# Altium PCB Arduino_Nano_V3.3.PcbDoc
Units mil, origin at the board's own origin, x right, y up, seen from the top; angles counter-clockwise.
Board outline 1702.76 x 708.66 mil, 2 copper layers (Top Layer, Bottom Layer), stack 65.792 mil thick; 27 components, 43 nets, 160 pads, 66 vias.
Unrouted connection lines stored in the file: 2.
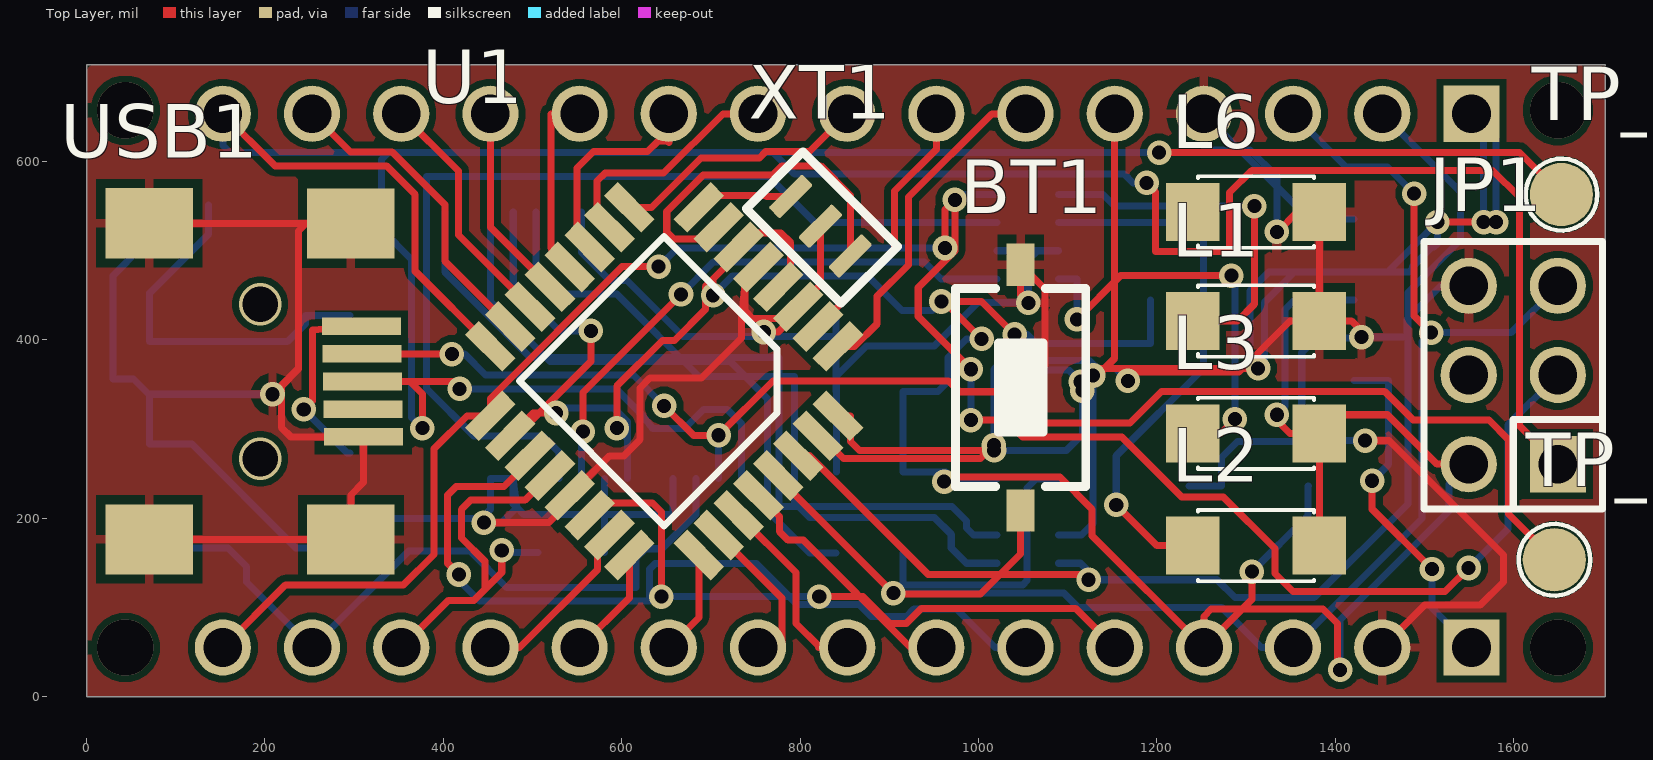
[diagram p0: Top Layer view]
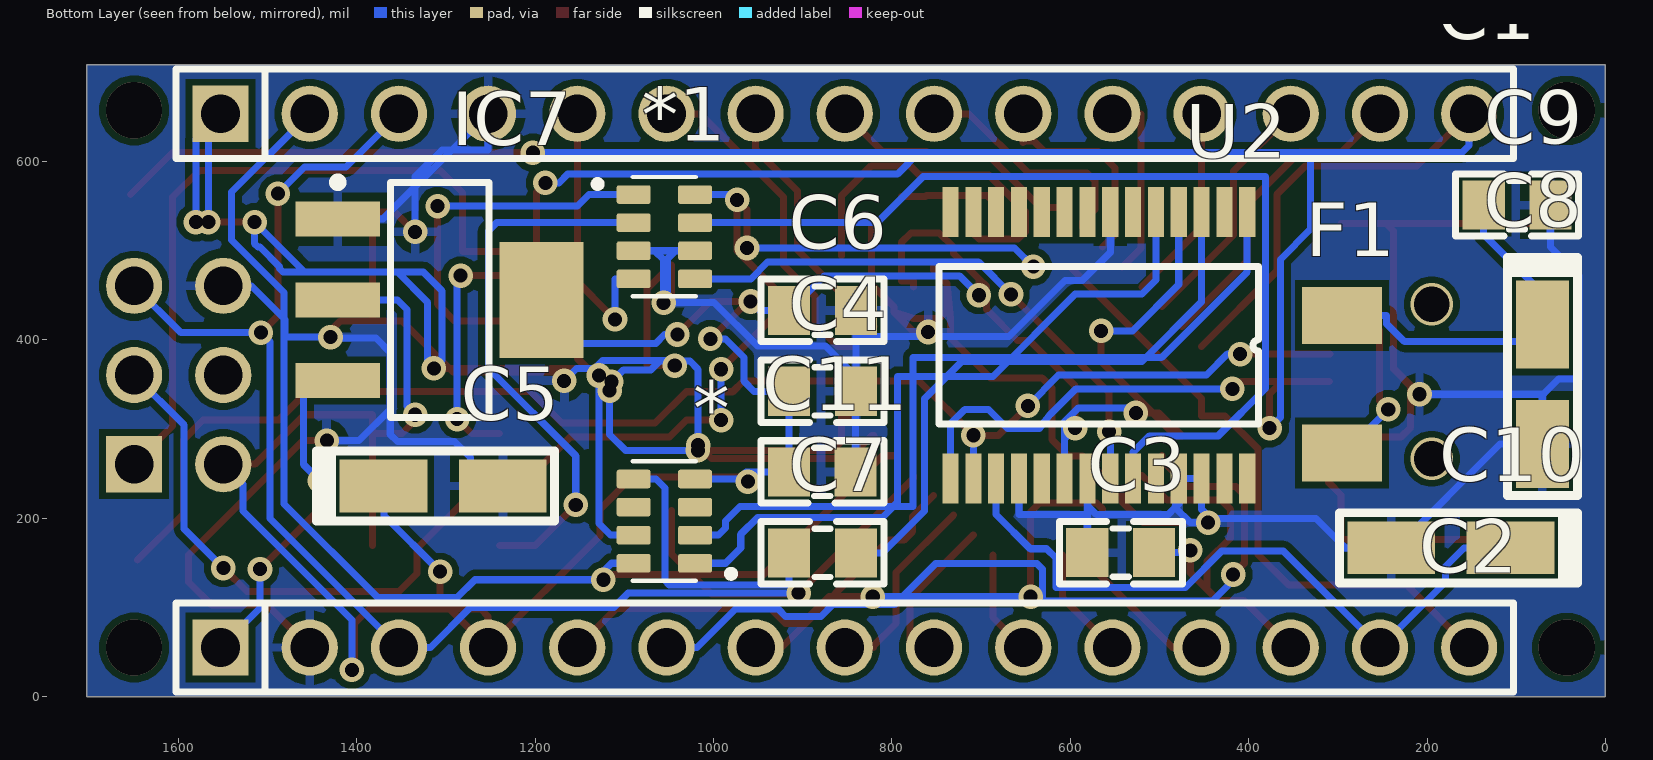
[diagram p1: Bottom Layer view, seen from below]
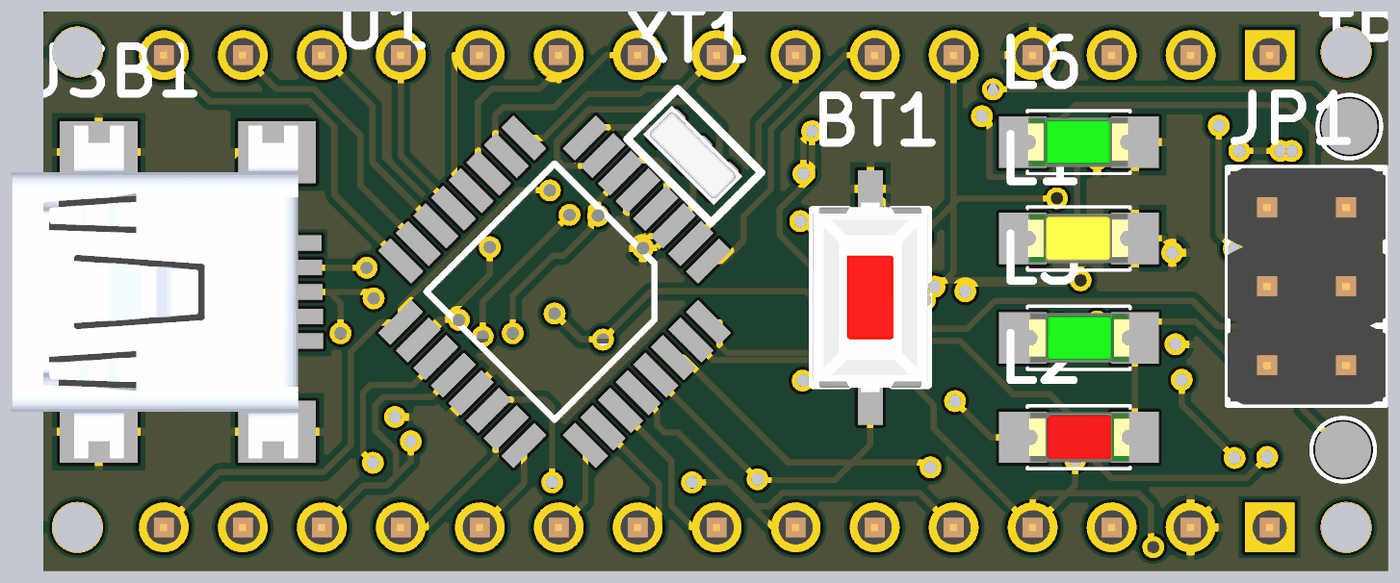
[diagram p2: 3D render of the assembled board from above, using the file's embedded part models]
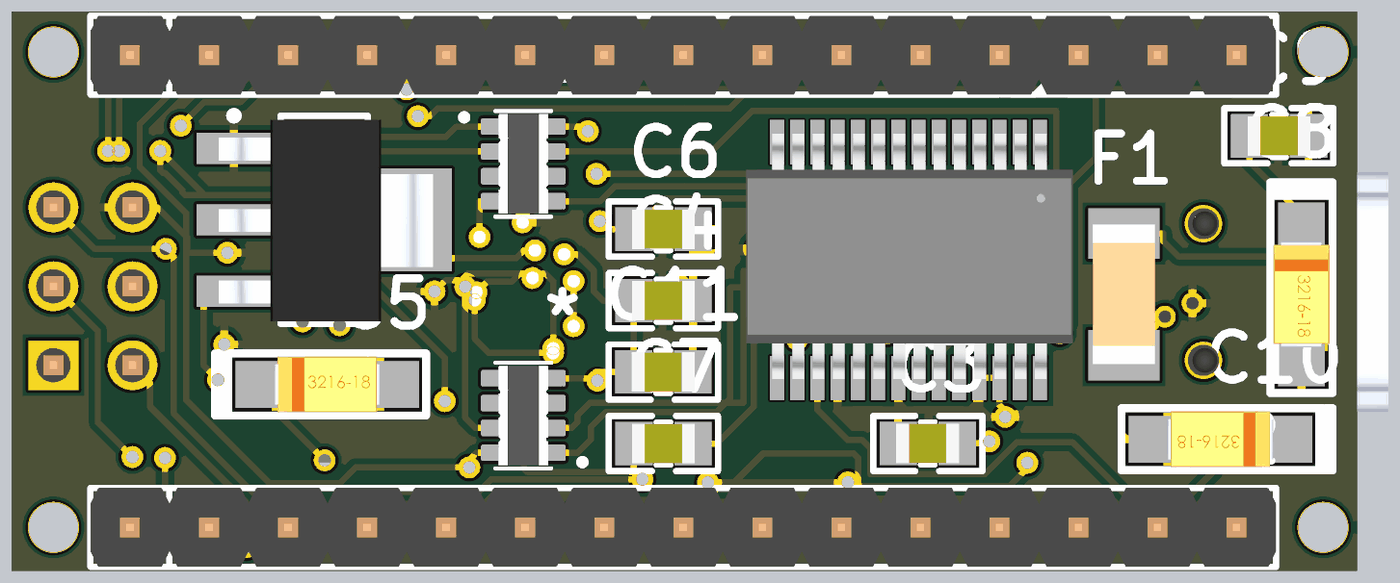
[diagram p3: 3D render of the assembled board from below, using the file's embedded part models]

## Layer stack, top to bottom
Top Solder: solder mask 0.4, Solder Resist, Dk 3.5
Top Layer: signal copper 1.4
Dielectric 1: dielectric 62.9921, FR-4, Dk 4.8
Bottom Layer: signal copper 1.4
Bottom Solder: solder mask 0.4, Solder Resist, Dk 3.5

## Board outline
0,0 1702.76,0 1702.76,708.66 0,708.66

## Design rules (kind name [scope] priority, off if disabled: settings)
Clearance [All] p1: gap=7.48 ignorepadtopadclearanceinfootprint=FALSE
PolygonConnect [All] p1: connectstyle=Relief reliefconductorwidth=10 reliefentries=4 polygonreliefangle="90 Angle" airgapwidth=10
RoutingVias RoutingVias_Power [InNetClass('Power_Class')] p1: holewidth=28 width=50 viastyle="Through Hole" minholewidth=28 minwidth=50 maxholewidth=28 maxwidth=50
RoutingVias RoutingVias_Signal [All] p2: holewidth=15.75 width=27.56 viastyle="Through Hole" minholewidth=15.75 minwidth=27.56 maxholewidth=15.75 maxwidth=27.56
SolderMaskExpansion [All] p1: expansion=4 istentingtop=FALSE
Width Width_Power [InNetClass('Power_Class')] p1: maxlimit=78.74 minlimit=11.81 preferedwidth=39.37
Width Width_Signal [All] p2: maxlimit=7.87 minlimit=7.87 preferedwidth=7.87
30 further rules are at their usual default settings.

## Components (designator, comment, footprint, x,y, rotation, side; value= is the part's Value field where it differs from the comment)
* "CAY16" CAY16 1055.12,196.85 r0 bottom
*1 "CAY16" CAY16 1055.12,515.75 r180 bottom
BT1 "Nut Nhan 2 Chan SMD 3x6x2.5" "Nut Nhan 2 Chan SMD 3x6x2.5" 1047.24,346.46 r90 top
C1 "JP15" JP15-D1T 1552.76,653.54 r180 bottom
C2 "JP15" JP15-D1T 1552.76,55.12 r180 bottom
C3 "10pF" "tu 0805" 543.31,161.42 r0 bottom
C4 "10pF" "tu 0805" 877.95,342.52 r180 bottom
C5 "10uF" "tu tantalum smd3216" 1303.15,236.22 r180 bottom
C6 "10pF" "tu 0805" 877.95,433.07 r180 bottom
C7 "105" "tu 0805" 877.95,161.42 r180 bottom
C8 "10uF" "tu tantalum smd3216" 70.6,350.39 r270 bottom
C9 "105" "tu 0805" 99.17,551.32 r180 bottom
C10 "10uF" "tu tantalum smd3216" 173.23,166.85 r0 bottom
C11 "105" "tu 0805" 877.95,251.97 r0 bottom
F1 "0.5A 125V" "Cau Chi SMD1808" 295.28,350.39 r90 bottom
IC7 "LM1117" SOT223-4N 1307.09,444.88 r180 bottom value=LM317
JP1 "JP 2x3 2.54" "JP 2x3 DT" 1599.61,360.63 r90 top
L1 "LED 0805" LED-1206-Yellow 1240.16,421.26 r0 top
L2 "LED 0805" LED-1206-Red 1382.16,169.29 r180 top
L3 "LED 0805" LED-1206-Green 1382.16,295.28 r180 top
L6 "LED 0805" LED-1206-Green 1240.16,543.31 r0 top
TP_D+ "TP_D+" TP 1700.59,516.73 r90 top
TP_D- "TP_D-" TP 1692.72,107.28 r90 top
U1 "ATMEGA328P_TQFP32" TQFP32 842.4,392.79 r225 top
U2 "FT232RL" SSOP28 401.57,543.31 r270 bottom
USB1 "USB Mini 5p SMD" "USB Mini 5p SMD" 173.23,350.39 r90 top
XT1 "20Mhz" "Thach Anh 3 Chan SMD" 856.24,494.15 r135 top value=4Mhz

## Footprints (in the part's own frame and the unit in brackets; to place one, negate y for a bottom-side part, rotate by r counter-clockwise, add the part's x,y. Pads: shape width x height; smd on the part's side, far side on the other; paste and mask are expansions set on the pad)
"Cau Chi SMD1808" [mil]
  rect 64x90 smd: 1(-77,0) 2(77,0)
  body extent -91,-39 91,39, height 39
CAY16 [mm]
  rrect25% 0.97x0.53 smd: 1(-0.875,1.2) 2(-0.875,0.4) 3(-0.875,-0.4) 4(-0.875,-1.2) 5(0.875,-1.2) 6(0.875,-0.4) 7(0.875,0.4) 8(0.875,1.2)
  silkscreen extent -2,-1.7 0.9,1.7, body extent -0.8,-1.6 0.8,1.6, height 0.6
JP15-D1T [mm] "15  pins, 1 row, straight, gold plating"
  rect 1.6x1.6 hole 1.1: 1(0,0)
  round 1.6 hole 1.1: 2(2.54,0) 3(5.08,0) 4(7.62,0) 5(10.16,0) 6(12.7,0) 7(15.24,0) 8(17.78,0) 9(20.32,0) 10(22.86,0) 11(25.4,0) 12(27.94,0) 13(30.48,0) 14(33.02,0) 15(35.56,0)
  silkscreen extent -1.27,-1.27 36.83,1.27, body extent -1.27,-1.27 36.83,1.27, height 8.54
"JP 2x3 DT" [mm]
  rect 1.6x1.6 hole 1.1: 1(-2.54,-1.27)
  round 1.6 hole 1.1: 2(0,-1.27) 3(2.54,-1.27) 4(2.54,1.27) 5(0,1.27) 6(-2.54,1.27)
  silkscreen extent -3.81,-2.54 3.81,2.54, body extent -3.81,-2.54 3.81,2.54, height 8.55
LED-1206-Green [mil]
  rect 60x65 smd: 1(0,0) 2(142,0)
  silkscreen extent 6,-40 136,40, body extent 7,-31 133,32, height 43
LED-1206-Red [mil]
  rect 60x65 smd: 1(0,0) 2(142,0)
  silkscreen extent 6,-40 136,40, body extent 7,-31 133,32, height 43
LED-1206-Yellow [mil]
  rect 60x65 smd: 1(0,0) 2(142,0)
  silkscreen extent 6,-40 136,40, body extent 7,-31 133,32, height 43
"Nut Nhan 2 Chan SMD 3x6x2.5" [mm] "Switch SMD type"
  rect 1.2x0.8 smd: 1(-3.5,0) 2(3.5,0)
  silkscreen extent -2.82,-1.85 2.82,1.85, body extent -3.05,-1.85 3.05,1.85, height 2.5
SOT223-4N [mm] "SOT223, 4-Leads, Body 6.5x3.5mm, Pitch 2.3mm, Lead Span 7mm, IPC Medium Density"
  rect 2.4x1 smd: 1(-2.9,2.3) 2(-2.9,0) 3(-2.9,-2.3)
  rect 2.4x3.3 smd: 4(2.9,0)
  silkscreen extent -3.03,-3.35 1.4,3.47, body extent -3.39,-3.27 3.5,3.23, height 1.72
SSOP28 [mm]
  rect 1.43x0.46 smd mask+0.06: 1(0,0) 2(0,-0.65) 3(0,-1.3) 4(0,-1.95) 5(0,-2.6) 6(0,-3.25) 7(0,-3.9) 8(0,-4.55) 9(0,-5.2) 10(0,-5.85) 11(0,-6.5) 12(0,-7.15) 13(0,-7.8) 14(0,-8.45) 15(7.59,-8.45) 16(7.59,-7.8) 17(7.59,-7.15) 18(7.59,-6.5) 19(7.59,-5.85) 20(7.59,-5.2) 21(7.59,-4.55) 22(7.59,-3.9) 23(7.59,-3.25) 24(7.59,-2.6) 25(7.59,-1.95) 26(7.59,-1.3) 27(7.59,-0.65) 28(7.59,0)
  silkscreen extent 1.55,-8.77 6.04,0.33, body extent -0.27,-9.44 7.63,1.05, height 2.01
"Thach Anh 3 Chan SMD" [mm] "SMD Crystal CMR309T package"
  rrect25% 0.45x1.35 smd: 1(0,0) 2(1.2,0) 3(2.4,0)
  silkscreen extent -0.76,-1.14 3.05,1.14, body extent -0.41,-0.63 2.79,0.67, height 1.02
TP [mm]
  round 1.8 smd: 1(1.175,1.195)
  silkscreen extent 0.15,0.17 2.2,2.21
TQFP32 [mm]
  rect 1.5x0.55 smd paste+0 mask+0.1: 1(0,0) 2(0,-0.8) 3(0,-1.6) 4(0,-2.4) 5(0,-3.2) 6(0,-4) 7(0,-4.8) 8(0,-5.6) 17(8.4,-5.6) 18(8.4,-4.8) 19(8.4,-4) 20(8.4,-3.2) 21(8.4,-2.4) 22(8.4,-1.6) 23(8.4,-0.8) 24(8.4,0)
  rect 0.55x1.5 smd paste+0 mask+0.1: 9(1.4,-7) 10(2.2,-7) 11(3,-7) 12(3.8,-7) 13(4.6,-7) 14(5.4,-7) 15(6.2,-7) 16(7,-7) 25(7,1.4) 26(6.2,1.4) 27(5.4,1.4) 28(4.6,1.4) 29(3.8,1.4) 30(3,1.4) 31(2.2,1.4) 32(1.4,1.4)
  silkscreen extent 1.28,-5.72 7.11,0.12, body extent -0.32,-7.3 8.7,1.71, height 1.1
"tu 0805" [mm] "Compoment SMD 80x50mil"
  rect 1.2x1.4 smd: 1(-0.946,-0.003) 2(0.954,-0.003)
  silkscreen extent -1.75,-0.89 1.75,0.89, body extent -1.01,-0.64 1.01,0.63, height 0.61
"tu tantalum smd3216" [mm]
  rect 2.5x1.5 smd: 1(-1.7,0) 2(1.7,0)
  silkscreen extent -3.61,-1 3.18,1, body extent -1.7,-0.9 1.7,0.9, height 1.69
"USB Mini 5p SMD" [mm]
  rect 0.5x2.25 smd: 1(1.651,-3.429) 2(0.864,-3.442) 3(0.076,-3.454) 4(-0.711,-3.467) 5(-1.499,-3.48)
  rect 2x2.5 smd: 5(-4.424,-3.124) 5(-4.42,2.616) 5(4.576,-3.124) 5(4.58,2.616)
  body extent -5.27,-3.8 5.43,5.4, height 3.95

## Part data
C1 C2: "WR-PHD 2.54 mm Angled Socket Header", Manufacturer="W¨¹rth Elektronik eiSos GmbH", partNo=613015143121, ComponentLink1 Description=Manufacturer, ComponentLink1URL=http://www.we-online.com, ComponentLink2 Description=Datasheet, ComponentLink2URL=http://katalog.we-online.de/em/datasheet/6130xx143121.pdf, Created by="Karrer Zheng", Created Date="29 March 2013", NoPins=15
C3 C4 C6: library part "Tu 0805 10pF 50V 10%", "Dán", Chung_Loai=Dán, Don_Vi=Con, Ma_Hang=MH004554, So_Chan=2, Ten_Linh_Kien="Tụ 0805 10P 10% 50V"
C5 C8 C10: library part "Tu tantalum 10uF 16V SMD3216", "Dán", Chung_Loai=Dán, Don_Vi=Con, Ma_Hang=MH001954, So_Chan=2, Ten_Linh_Kien="Tụ tantalum 106C-10uF 16V SMD3216"
C7 C9 C11: library part "Tu 0805 105 50V 10%", "Dán", Chung_Loai=Dán, Don_Vi=Con, Ma_Hang=MH004552, So_Chan=2, Ten_Linh_Kien="Tụ 0805 105-1uF 10% 50V"
F1: library part "Cau chi 0.5A 125V SMD1808", "Cau chi 0.5A 125V SMD1808", Ma_Hang=MH009241, Ten="Cầu Chì 0.5A 125V SMD1808 0451.500MRL"
IC7: "3v3"
JP1: library part "JP 2x3 2.54 Duc Thang", "Cắm", Chung_Loai=Cắm, Don_Vi=Con, Ma_Hang=MH002686, Ten_Linh_Kien="Jump Đôi Đực 2.54MM 2x40P Thẳng 11MM"
L1: library part "LED 1206 Vang", "Dán", Chung_Loai=Dán, Don_Vi=Con, Ma_Hang=MH002331, Ten_Linh_Kien="LED1206 Màu Vàng (Yellow)"
L2: library part "LED 1206 Do", "Dán", Chung_Loai=Dán, Don_Vi=Con, Ma_Hang=MH002334, Ten_Linh_Kien="LED1206 Màu Đỏ (Red)"
L3 L6: library part "LED 1206 Xanh La", "Dán", Chung_Loai=Dán, Don_Vi=Con, Ma_Hang=MH002947, Ten_Linh_Kien="LED1206 Màu Xanh Lá (Green)"
TP_D+ TP_D-: library part TP
U1: library part ATMEGA328P
USB1: "USB Type B", Ma_Hang=MH001022, Ten="MiniUSB 5P SMD"
XT1: library part "Thach anh 3 Chan SMD", "Crystal For all Crystal 2pin."
BT1: Ma_Hang=MH001036, Ten="Nút Nhấn 2 Chân 3x6x2.5MM SMD"

## Via types
v1: diameter 27.56, hole 15.75, Top Layer to Bottom Layer, 60 vias
v2: diameter 62.99, hole 62.99, Top Layer to Bottom Layer, 4 vias
v3: diameter 47.24, hole 39.37, Top Layer to Bottom Layer, 2 vias

## Nets (pads, with @x,y where several pads share a name; then routed paths per layer and width w, separated by ;. In a path a pad name is that pad's centre, name@x,y a point inside that pad or via, vN(x,y) a via of type N, cw(c..) or ccw(c..) an arc to the next point about the centre after c; other vN are vias at no path point)
3V3: C2.14 C10.1 U2.17 | length 788.3
  Bottom Layer w7.87: C10.1 158.72,166.85 179.46,146.11 179.46,128.42 C2.14 360.75,163.11 430.46,163.11 470.99,122.57 615.92,122.57 615.92,155.34 626.46,165.87 644.83,165.87 683.07,204.11 U2.17
+5V: *.4 C2.4 C4.1 C5.1 C6.1 C11.2 IC7.2 IC7.4 JP1.6 L2.1 L3.1 U1.4 U1.6 U1.18 U2.4 U2.20 | length 3751.3
  Top Layer w7.87: v1(526.46,318.11) 507.46,318.11 ; v1(565.46,410.11) 565.46,376.11 507.46,318.11 ; v1(594.46,301.09) 594.46,348.31 645.56,399.42 658.99,399.42 693.69,434.11 693.69,459.75 702.46,468.52 ; v1(702.46,450.11) 702.46,468.52 ; U1.4 775.59,466.11 789.46,466.11 789.46,509.11 778.46,520.11 747.01,520.11 U1.6 731.05,497.11 702.46,468.52 ; v1(958.46,443.11) v1@961.46,443.11 ; v1(961.46,241.11) 966.46,246.11 1091.46,246.11 1127.46,210.11 1127.46,180.42 C2.4 ; v1(1003.46,401.11) v1@961.46,443.11 ; v1(1040.46,406.11) 1003.46,443.11 v1@961.46,443.11 ; v1(1306.46,140.11) 1306.46,108.82 1295.75,98.11 ; v1(1334.46,316.11) 1334.46,310.11 1349.29,295.28 L3.1 ; L2.1 L3.1 ; v1(1405.46,30.11) 1402.46,33.11 1402.46,82.11 1386.46,98.11 1295.75,98.11 ; JP1.6 1513.94,260.63 1458.46,316.11 1382.16,316.11 L3.1 ; 507.46,318.11 481.92,292.57 U1.18 500.47,318.11 507.46,318.11 ; C2.4 1295.75,98.11 ; C2.4 1252.76,90.11 1260.76,98.11 1295.75,98.11
  Bottom Layer w7.87: U2.4 478.35,462.11 530.35,410.11 v1(565.46,410.11) ; v1(526.46,318.11) 532.27,323.92 590.65,323.92 606.3,308.27 606.3,289.24 ; v1(594.46,301.09) 606.3,289.24 ; U2.20 606.3,289.24 ; v1(702.46,450.11) 724.26,471.92 875.46,471.92 914.44,432.94 C6.1 948.28,432.94 v1(958.46,443.11) v1@961.46,443.11 ; v1(961.46,241.11) 950.46,252.1 ; v1(1003.46,401.11) 986.46,401.11 965.81,380.47 965.81,353.74 954.46,342.39 C4.1 915.18,296.8 915.53,296.46 C11.2 950.46,252.1 ; *.4 971.46,244.09 963.46,252.1 950.46,252.1 ; v1(1040.46,406.11) 1054.8,406.11 1064.77,396.14 1192.91,396.14 IC7.4 ; v1(1306.46,140.11) 1369.46,203.11 1369.46,236.22 C5.1 ; v1(1334.46,316.11) 1343.68,325.34 1343.68,434.11 1354.46,444.88 IC7.2 ; v1(1405.46,30.11) 1405.46,86.1 1527.46,208.1 1527.46,238.48 JP1.6
A0: C2.12 U1.23 | length 200.6
  Top Layer w7.87: C2.12 485.46,55.12 573.06,142.72 573.06,167.99 U1.23
A1: C2.11 U1.24 | length 126.9
  Top Layer w7.87: C2.11 608.56,110.92 U1.24
A2: C2.10 U1.25 | length 117.8
  Top Layer w7.87: C2.10 686.51,88.87 U1.25
A3: C2.9 U1.26 | length 182.1
  Top Layer w7.87: U1.26 779.46,110.54 779.46,55.12 C2.9
A4: C2.8 U1.27 | length 217.7
  Top Layer w7.87: U1.27 795.46,139.08 795.46,82.11 820.46,57.11 820.46,55.12 C2.8
A5: C2.7 U1.28 | length 280.2
  Top Layer w7.87: U1.28 776.95,202.12 776.95,184.96 786.46,175.46 803.62,175.46 923.96,55.12 C2.7
A6: C2.6 U1.19 | length 943.6
  Top Layer w7.87: v1(417.46,137) 404.9,149.56 404.9,226.11 414.46,235.66 468.01,235.66 497.2,264.86 U1.19
  Bottom Layer w7.87: v1(417.46,137) 417.46,130.11 440.35,107.22 631.28,107.22 631.28,142.93 637.46,149.11 751.17,149.11 797.17,103.11 866.46,103.11 879.46,90.11 919.46,90.11 927.46,98.11 975.46,98.11 1018.45,55.12 C2.6
A7: C2.5 U1.22 | length 735.4
  Top Layer w7.87: U1.22 564.01,210.67 570.46,217.11 634.46,217.11 644.46,207.11 v1(644.46,112.11) ; v1(821.46,112.11) 870.63,112.11 900.63,82.11 919.06,82.11 936.06,99.11 1108.76,99.11 C2.5
  Bottom Layer w7.87: v1(644.46,112.11) v1(821.46,112.11)
AREF: C2.13 C3.1 U1.20 | length 429.9
  Top Layer w7.87: C2.13 405.75,108.11 434.46,108.11 446.46,120.11 ; v1(465.46,164.11) 465.46,139.11 446.46,120.11 ; U1.20 491.75,220.31 430.46,220.31 420.26,210.11 420.26,178.11 446.46,151.91 446.46,120.11
  Bottom Layer w7.87: v1(465.46,164.11) 468.01,161.55 C3.1
CBUS0: *1.7 U2.23 | length 1106.2
  Bottom Layer w7.87: U2.23 529.53,274.11 511.08,292.56 434.01,292.56 381.1,345.47 381.1,583.11 764.84,583.11 816.46,531.5 *1.7
CBUS1: *1.5 U2.22 | length 629.7
  Top Layer w7.87: v1(556.46,297.11) 556.46,341.11 v1(666.46,451.11)
  Bottom Layer w7.87: U2.22 555.12,295.77 v1(556.46,297.11) ; v1(666.46,451.11) 702.62,487.27 939.29,487.27 958.06,468.5 *1.5
D0RX: *.8 C1.2 U1.30 | length 1539.4
  Top Layer w7.87: v1(1123.46,131.11) 1117.46,137.11 943.65,137.11 ; 943.65,137.11 943.46,137.11 810.46,270.11 797.86,270.11 U1.30 810.46,270.3 943.65,137.11
  Bottom Layer w7.87: *.8 1114.46,149.61 1123.46,140.61 v1(1123.46,131.11) 1267.46,131.11 1287.46,111.11 1376.46,111.11 1481.46,216.11 1481.46,453.17 1540.46,512.17 1540.46,565.84 C1.2
D1/TX: *.7 C1.1 U1.31 | length 1722.8
  Top Layer w7.87: U1.31 822.99,292.57 848.46,267.11 1002.46,267.11 v1(1017.26,281.91) ; v1(1114.46,353.11) 1129.46,368.11 v1@1136.46,368.11 ; v1(1128.46,360.11) v1@1136.46,368.11 ; v1(1313.46,368.11) v1@1136.46,368.11 ; v1(1514.46,532.11) v1(1566.46,532.11) v1(1580.46,532.11)
  Bottom Layer w7.87: v1(1017.26,281.91) 1017.26,367.11 1026.46,376.31 1060.15,376.31 1069.9,366.56 1101.01,366.56 v1(1114.46,353.11) ; *.7 1115.45,181.1 1128.46,194.11 v1(1128.46,360.11) ; v1(1566.46,532.11) C1.1@1566.46,639.84 ; v1(1580.46,532.11) 1580.46,625.84 C1.1@1566.46,639.84 ; 1354.46,476.11 1458.46,476.11 ; 1354.46,476.11 1325.46,476.11 1304.46,455.11 1304.46,377.11 v1(1313.46,368.11) 1320.46,375.11 1320.46,442.11 1354.46,476.11 ; 1458.46,476.11 1482.68,476.11 1486.46,479.89 1486.46,482.11 1508.46,504.11 1510.68,504.11 1514.46,507.89 v1(1514.46,532.11) 1458.46,476.11 ; C1.1@1566.46,639.84 1566.46,653.54 C1.1 C1.1@1566.46,639.84
D2: C1.5 U1.32 | length 688.9
  Top Layer w7.87: U1.32 856.46,314.84 856.46,286.11 866.46,276.11 v1(1017.46,276.11) ; v1(1116.46,343.11) 1152.76,379.41 C1.5
  Bottom Layer w7.87: v1(1017.46,276.11) 1098.46,276.11 1116.46,294.11 v1(1116.46,343.11)
D3: C1.6 U1.1 | length 381
  Top Layer w7.87: U1.1 861.14,392.79 886.46,418.11 886.46,449.12 921.46,484.12 921.46,560.11 1014.89,653.54 C1.6
D4: C1.7 U1.2 | length 293.4
  Top Layer w7.87: U1.2 905.9,500.83 905.9,566.95 952.76,613.81 C1.7
D5: C1.8 U1.9 | length 287.6
  Top Layer w7.87: U1.9 633.33,548.69 688.75,604.11 754.46,604.11 761.46,611.11 810.32,611.11 C1.8
D6: C1.9 U1.10 | length 269
  Top Layer w7.87: U1.10 586.29,532.28 572.46,546.11 572.46,578.11 581.46,587.11 647.01,587.11 713.45,653.54 C1.9
D7: C1.10 U1.11 | length 242.5
  Top Layer w7.87: U1.11 550.04,518.13 550.04,592.69 568.46,611.11 628.98,611.11 640.99,623.12 651.05,623.12 652.76,621.41 C1.10
D8: C1.11 U1.12 | length 212.8
  Top Layer w7.87: U1.12 520.46,503.17 520.46,653.54 C1.11
D9: C1.12 U1.13 | length 221.6
  Top Layer w7.87: C1.12 452.76,526.32 U1.13
D10: C1.13 U1.14 | length 276
  Top Layer w7.87: C1.13 416.93,589.37 416.93,517.61 U1.14
D11/MOSI: C1.14 JP1.5 U1.15 | length 358
  Top Layer w7.87: C1.14 295.67,610.63 342.65,610.63 401.57,551.71 401.57,488.42 U1.15
D12/MISO: C1.15 JP1.1 U1.16 | length 2442.2
  Top Layer w7.87: C1.15 211.03,595.27 336.29,595.27 368.46,563.11 368.46,477 U1.16 ; v1(1188.46,576.11) 1198.46,566.11 1198.46,499.11 1281.57,499.11 1281.57,565.23 1306.46,590.11 1576.46,590.11 1606.46,560.11 1606.46,303.78 JP1.1
  Bottom Layer w7.87: C1.15 152.76,618.11 160.76,610.11 769.46,610.11 793.46,586.11 1163.46,586.11 1173.46,576.11 v1(1188.46,576.11)
D13/SCK: *1.8 C2.15 JP1.2 U1.17 | length 2395.5
  Top Layer w7.87: C2.15 222.75,125.11 355.06,125.11 389.55,159.59 389.55,278 426.39,314.84 U1.17 452.66,334.31 600.46,482.11 v1(641.46,482.11) ; v1(962.46,503.11) 962.46,546.11 v1(973.46,557.11) 973.46,500.01 932.46,459.01 932.46,426.11 v1(991.46,367.11) ; v1(991.46,310.11) 1030.46,310.11 1049.26,291.31 1160.65,291.31 1227.85,224.11 1274.46,224.11 1332.46,166.11 1332.46,138.11 1352.65,117.91 1523.26,117.91 v1(1549.65,144.31)
  Bottom Layer w7.87: v1(641.46,482.11) 662.46,503.11 v1(962.46,503.11) ; v1(973.46,557.11) 979.34,562.99 *1.8 ; v1(991.46,310.11) v1(991.46,367.11) ; v1(1549.65,144.31) 1593.46,188.11 1593.46,304.48 JP1.2
GND: *1.3 *1.6 BT1.2 C1.4 C2.2 C3.2 C4.2 C5.2 C6.2 C8.2 C9.2 C10.2 C11.1 IC7.1 JP1.4 L1.2 L6.2 U1.3 U1.5 U1.21 U2.7 U2.18 U2.21 U2.25 U2.26 USB1.5 XT1.2 | length 6297.2
  Top Layer w7.87: USB1.5@70.23,176.39 182.46,176.39 182.62,176.23 296.23,176.23 296.23,226.11 310.23,240.11 310.23,291.39 228.82,291.39 218.26,301.96 218.26,347.97 237.66,367.38 237.66,368.32 ; USB1.5@70.23,530.72 182.46,530.72 182.62,530.56 246.11,530.56 ; v1(208.46,339.11) 237.66,368.32 ; USB1.5@296.23,530.56 246.11,530.56 ; v1(445.46,195.11) 518.46,195.11 541.74,218.4 U1.21 586.09,270.11 602.46,270.11 620.46,288.11 620.46,346.11 631.46,357.11 689.46,357.11 734.46,402.11 734.46,424.11 U1.5@738.46,463.25 ; U1.5 753.32,478.11 U1.5@738.46,463.25 ; v1(759.46,408.87) 775.55,408.96 U1.3@797.86,431.27 ; XT1.2 822.83,462.31 U1.3 U1.3@797.86,431.27 ; v1(1043.46,371.11) 1074.46,371.11 1074.46,457.04 BT1.2 1047.24,450.32 v1(1055.96,441.61) ; v1(1167.46,354.11) 1177.46,364.11 1292.31,364.11 1349.46,421.26 L1.2 ; v1(1334.46,521.11) 1335.26,521.11 1357.46,543.31 L6.2 L1.2 ; v1(1429.46,403.11) 1429.46,410.26 1418.46,421.26 L1.2 ; v1(1433.46,287.11) 1460.46,287.11 1588.65,158.91 1588.65,128.75 1562.46,102.56 1500.19,102.56 C2.2 ; 237.66,368.32 237.66,522.11 246.11,530.56 ; U1.5@738.46,463.25 738.46,432.11 746.46,424.11 775.55,424.11 U1.3@797.86,431.27
  Bottom Layer w7.87: C9.2 61.59,504.11 29.46,471.98 29.46,356.11 52.6,356.11 70.6,338.11 ; v1(208.46,339.11) 70.6,339.11 70.6,338.11 ; v1(445.46,195.11) 465.46,195.11 482.46,212.11 ; U2.7 555.12,498.11 586.56,466.66 606.01,466.66 668.79,403.89 v1@759.46,403.89 ; U2.21 580.71,214.36 ; C3.2 580.88,204.47 ; U2.18 657.48,204.47 580.88,204.47 ; v1(759.46,408.87) v1@759.46,403.89 ; C6.2 840.38,403.89 ; C11.1 C4.2@840.72,342.39 ; *1.6 1042.46,500 ; v1(1043.46,371.11) 1043.46,377.11 1124.46,377.11 1133.46,368.11 1153.46,368.11 v1(1167.46,354.11) ; v1(1055.96,441.61) 1055.96,490.11 1065.85,500 ; *1.3 1065.85,500 ; C5.2 1272.46,236.22 1272.46,268.11 1290.46,286.11 1354.46,286.11 1362.46,294.11 1362.46,322.11 ; v1(1334.46,521.11) 1334.46,571.84 ; IC7.1 1370.87,535.43 1334.46,571.84 ; v1(1433.46,287.11) 1397.46,287.11 1362.46,322.11 ; JP1.4 1517.98,460.63 1480.46,423.11 1480.46,403.11 v1(1429.46,403.11) 1428.46,402.11 1378.46,402.11 1362.46,386.11 1362.46,322.11 ; 70.6,338.11 C8.2 70.6,283.11 118.2,283.11 234.46,166.85 C10.2 291.4,166.85 324.37,199.82 442.47,199.82 452.76,210.11 U2.26 U2.25 ; U2.25 482.46,212.11 ; U2.25 478.35,216.22 482.46,212.11 ; 482.46,212.11 490.1,204.47 570.81,204.47 580.71,214.36 ; 580.71,204.64 580.71,214.36 ; 580.71,204.64 580.71,204.47 580.88,204.47 ; 580.71,204.64 580.88,204.47 ; v1@759.46,403.89 840.38,403.89 ; 840.38,403.89 C4.2 C4.2@840.72,342.39 ; C4.2@840.72,342.39 840.72,359.38 874.46,393.11 950.46,393.11 999.46,442.11 1043.46,442.11 1051.46,450.11 1051.46,491 1042.46,500 ; 1042.46,500 1065.85,500 ; 1293.19,613.11 1304.46,613.11 1334.46,583.11 1334.46,571.84 ; 1293.19,613.11 1252.76,613.11 C1.4 1293.19,613.11 ; 1293.19,613.11 1334.46,571.84
Net*1_1: *1.1 L1.1 | length 412
  Top Layer w7.87: L1.1 1290.46,421.26 1309.26,440.06 v1(1309.26,550.11)
  Bottom Layer w7.87: *1.1 1139.57,562.99 1152.46,550.11 v1(1309.26,550.11)
Net*1_2: *1.2 L2.2 | length 619
  Top Layer w7.87: v1(1154.46,215.11) 1200.27,169.29 L2.2
  Bottom Layer w7.87: *1.2 1243.07,531.5 1252.46,522.11 1252.46,368.11 1154.46,270.11 v1(1154.46,215.11)
Net*1_4: *1.4 L3.2 | length 476
  Top Layer w7.87: v1(1110.46,423.11) 1159.46,472.11 v1(1283.46,472.11) ; L3.2 1271.46,295.28 v1(1287.46,311.28)
  Bottom Layer w7.87: *1.4 1110.46,468.5 v1(1110.46,423.11) ; v1(1283.46,472.11) 1287.46,468.11 v1(1287.46,311.28)
Net*_6: *.6 L6.1
NetC7_2: C7.2 U2.3 | length 678.4
  Bottom Layer w7.87: U2.3 452.76,442.81 519.61,375.95 721.61,375.95 763.46,334.11 763.46,208.28 810.46,161.28 C7.2
NetF1_1: F1.1 USB1.1 | length 220.2
  Top Layer w7.87: v1(243.46,322.11) 253.02,331.67 253.02,410.96 USB1.1
  Bottom Layer w7.87: v1(243.46,322.11) 292.17,273.39 F1.1
NetTP_D+_1: TP_D+.1 U2.15 USB1.3 | length 2248.9
  Top Layer w7.87: USB1.3 362.46,353.39 ; v1(376.46,301.11) 376.46,339.39 362.46,353.39 ; v1(418.32,345.24) 410.17,353.39 362.46,353.39 ; v1(1202.46,610.11) 1606.42,610.11 TP_D+.1
  Bottom Layer w7.87: v1(376.46,301.11) 364.46,313.11 364.46,490.39 330.58,524.27 330.58,602.11 338.58,610.11 v1(1202.46,610.11) ; v1(418.32,345.24) 593.74,345.24 622.26,316.73 634.46,300.91 670.4,300.91 691.6,322.11 718.25,322.11 734.25,306.11 U2.15
NetTP_D-_1: TP_D-.1 U2.16 USB1.2 | length 1609.9
  Top Layer w7.87: USB1.2 409.17,384.39 v1(409.46,384.11) ; v1(647.46,326.11) 680.46,293.11 v1(708.66,293.11) 769.69,354.14 966.26,354.14 978.49,341.91 1030.24,341.91 1065.49,306.66 1169.85,306.66 1205.3,342.11 1455.46,342.11 1487.46,310.11 1572.46,310.11 1594.46,288.11 1594.46,204.76 TP_D-.1
  Bottom Layer w7.87: v1(409.46,384.11) 423.94,384.11 447.46,360.6 612.97,360.6 v1(647.46,326.11) ; U2.16 v1(708.66,293.11)
NetU1_7: U1.7 XT1.1 | length 402.9
  Top Layer w7.87: U1.7 708.78,519.43 702.46,513.11 658.46,513.11 650.46,521.11 650.46,544.1 691.34,584.99 769.34,584.99 779.62,595.27 823.08,595.27 856.24,562.11 XT1.1
NetU1_8: U1.8 XT1.3 | length 112.7
  Top Layer w7.87: U1.8 686.51,555.16 693.46,562.11 761.31,562.11 762.46,560.97 XT1.3
RESET: *.5 BT1.1 C1.3 C2.3 C7.1 JP1.3 U1.29 | length 2122.6
  Top Layer w7.87: U1.29 775.59,244.98 v1(904.46,116.11) 905.46,115.11 1002.46,115.11 1047.24,159.9 BT1.1 ; v1(1488.46,564.11) 1488.46,427.11 v1(1507.46,408.11)
  Bottom Layer w7.87: C7.1 915.18,126.83 ; *.5 1064.44,244.09 1054.46,234.11 1054.46,130.11 1049.65,125.31 915.18,125.31 915.18,126.83 ; C1.3 1412.19,594.11 1458.46,594.11 v1(1488.46,564.11) ; JP1.3 1597.09,408.11 v1(1507.46,408.11) 1497.31,397.96 1497.31,199.67 C2.3 1317.45,55.12 1272.32,100.24 1111.49,100.24 1095.62,116.11 v1(904.46,116.11) 915.18,126.83
RX: *.1 U2.5 | length 816.1
  Bottom Layer w7.87: U2.5 503.94,467.11 519.74,451.31 594.46,451.31 686.65,359.11 793.46,359.11 793.46,218.11 810.46,201.11 950.46,201.11 969.46,182.11 969.46,166.61 986.46,149.61 *.1
TX: *.2 U2.1 | length 911.1
  Bottom Layer w7.87: U2.1 401.57,475.99 497.46,380.11 776.46,380.11 776.46,213.11 970.46,213.11 986.46,197.11 986.46,189.1 994.46,181.1 *.2
VIN: C2.1 IC7.3 | length 391
  Top Layer w7.87: v1(1441.46,242.11) 1441.46,210.11 v1(1508.46,143.11)
  Bottom Layer w7.87: IC7.3 1459.46,354.33 1459.46,260.11 v1(1441.46,242.11) ; v1(1508.46,143.11) 1508.46,99.42 C2.1
VUSB: C8.1 C9.1 F1.2 | length 422.6
  Bottom Layer w7.87: C9.1 136.39,518.16 70.6,452.36 C8.1 70.6,398.11 225.46,398.11 245.46,418.11 245.46,427.39 F1.2
pads on no net: *.3 U2.2 U2.6 U2.8 U2.9 U2.10 U2.11 U2.12 U2.13 U2.14 U2.19 U2.24 U2.27 U2.28 USB1.4
copper on no net:
  other v2: 43.31,55.12 1649.61,55.12 43.31,657.48 1649.61,657.48
  other v3: 194.65,266.78 194.65,440.01

## Polygon pours and split planes (outlines as drawn)
GND on Bottom Layer "GND_L02_P000" (solid, remove dead copper, pour order 0): 0,0 1702.7,0 1702.7,708.1 1703,708.4 1702.7,708.7 0,708.7
GND on Top Layer "GND_L01_P001" (solid, remove dead copper, pour order 1): 0,0 1702.7,0 1702.9,0.2 1702.9,708.6 0.04,708.7 0,708.7